# Altium PCB EncoderArm.PcbDoc
Units mil, origin at the board's own origin, x right, y up, seen from the top; angles counter-clockwise.
Board outline 1290 x 2525 mil, 2 copper layers (Top Layer, Bottom Layer); 11 components, 6 nets, 29 pads, 8 vias.
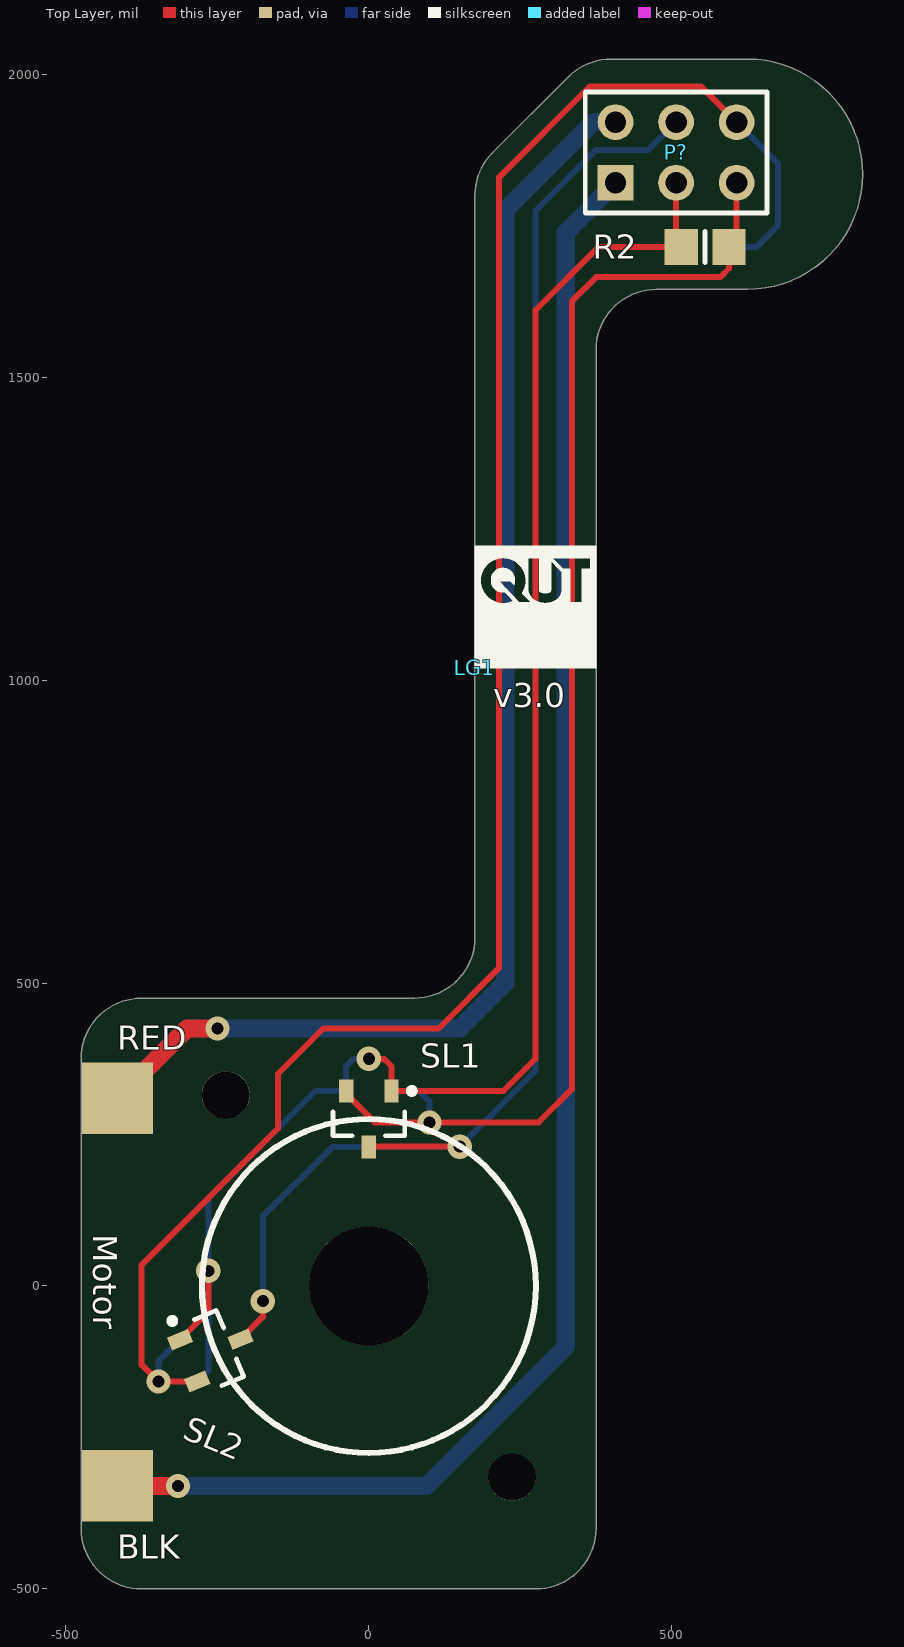
[diagram p0: Top Layer view]
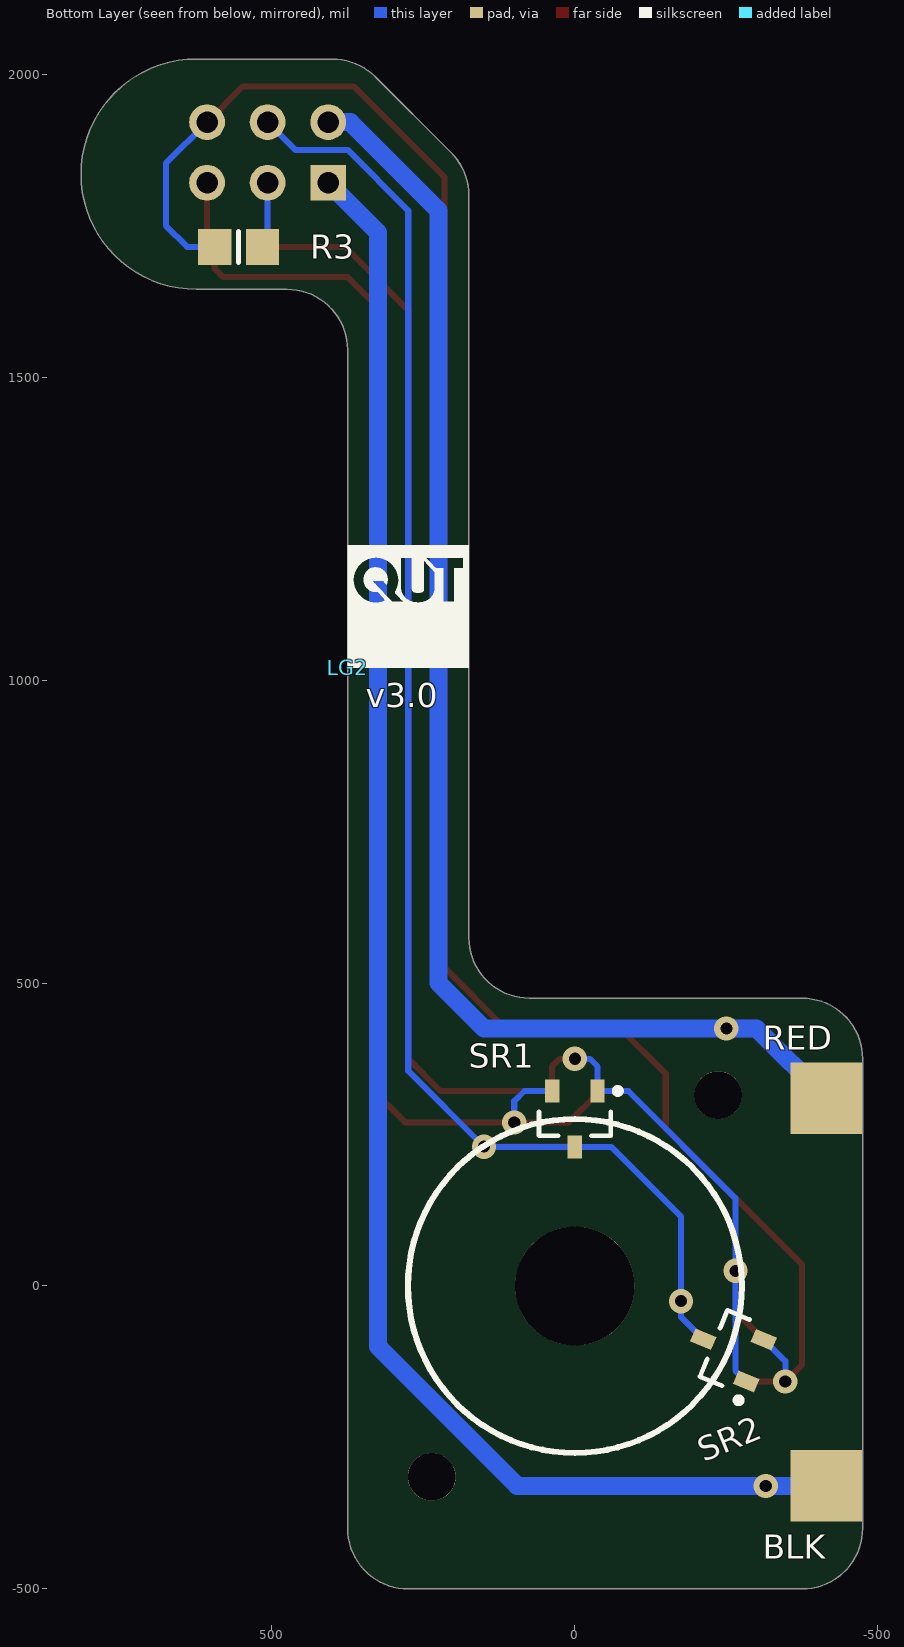
[diagram p1: Bottom Layer view, seen from below]

## Layer stack, top to bottom
Top Solder: solder mask 0.4, Solder Resist, Dk 3.5
Top Layer: signal copper 1.4
Dielectric 1: dielectric 12.6, FR-4, Dk 4.8
Bottom Layer: signal copper 1.4
Bottom Solder: solder mask 0.4, Solder Resist, Dk 3.5

## Board outline
-475,-400 ccw(c-375,-400) -375,-500 275,-500 ccw(c275,-400) 375,-400 375,1545 cw(c475,1545) 475,1645 625,1645 ccw(c625,1835) 625,2025 400,2025 ccw(c400,1925) 329.29,1995.71 204.29,1870.71 ccw(c275,1800) 175,1800 175,575 cw(c75,575) 75,475 -375,475 ccw(c-375,375) -475,375

## Design rules (kind name [scope] priority, off if disabled: settings)
Clearance [All] p1: gap=10 ignorepadtopadclearanceinfootprint=FALSE except(0: Arc-Hole Track-Hole SMDPad-Hole THPad-Hole Via-Hole Fill-Hole Poly-Hole Region-Hole Text-Hole)
PolygonConnect [All] p1: connectstyle=Relief reliefconductorwidth=10 reliefentries=4 polygonreliefangle="90 Angle" airgapwidth=10
RoutingVias [All] p1: holewidth=28 width=50 viastyle="Through Hole" minholewidth=28 minwidth=50 maxholewidth=28 maxwidth=50
SolderMaskExpansion [All] p1: expansion=4
Width [All] p1: maxlimit=30 minlimit=10 preferedwidth=10
30 further rules are at their usual default settings.

## Classes and differential pairs
component class EncoderArm: BLK LG1 LG2 P? R2 R3 RED SL1 SR1 SR2
net class Power: M1A M1B

## Components (designator, comment, footprint, x,y, rotation, side; value= is the part's Value field where it differs from the comment)
BLK "Pad_Motor" Pads_Motor -415,-330 r0 top
LG1 "QUT_Logo" QUT_Logo 175,1020 r0 top
LG2 "QUT_Logo" QUT_Logo 375,1020 r180 bottom
P? "Header 3X2" HDR2X3 407.09,1820.87 r0 top
R2 "Res2" 6-0805_M 555,1715 r180 top
R3 "Res2" 6-0805_M 555,1715 r180 bottom
RED "Pad_Motor" Pads_Motor -415,310 r0 top
SL1 "A1120 Hall Effect" SOT23-3N 0,275.59 r270 top
SL2 "A1120 Hall Effect" SOT23-3N -254.61,-105.43 r22.5 top
SR1 "A1120 Hall Effect" SOT23-3N 0,275.59 r270 bottom
SR2 "A1120 Hall Effect" SOT23-3N -254.61,-105.43 r22.5 bottom

## Footprints (in the part's own frame and the unit in brackets; to place one, negate y for a bottom-side part, rotate by r counter-clockwise, add the part's x,y. Pads: shape width x height; smd on the part's side, far side on the other; paste and mask are expansions set on the pad)
6-0805_M [mm] "Chip Resistor, Body 2.0x1.2mm, IPC Low Density"
  rect 1.4x1.5 smd: 1(-1,0) 2(1,0)
  silkscreen extent 0,-0.65 0,0.65, body extent -1.07,-0.7 1.07,0.7, height 0.7
HDR2X3 [mm] "Connector; Header; 3x2 Position"
  rect 1.5x1.5 hole 0.9: 1(0,0)
  round 1.5 hole 0.9: 2(0,2.54) 3(2.54,0) 4(2.54,2.54) 5(5.08,0) 6(5.08,2.54)
  silkscreen extent -1.27,-1.27 6.35,3.81
Pads_Motor [mm]
  rect 3x3 smd: 0(0,0)
  rect 3x3 smd far side: 0(0,0)
QUT_Logo [mil]
  silkscreen extent 0,0 200,202
SOT23-3N [mm] "SOT23, 3-Leads, Body 2.90x2.35mm, Pitch 0.95mm, IPC Medium Density"
  rect 0.95x0.6 smd: 1(-1.175,0.95) 2(-1.175,-0.95) 3(1.175,0)
  silkscreen extent -1.3,-1.5 0.7,1.93, body extent -0.7,-1.5 0.7,1.5, height 1.1

## Part data
P?: "Header, 3-Pin, Dual row"
R2 R3: "Resistor"
SL1 SL2 SR1 SR2: library part FT_SOT23-3

## Free pads (board coordinates)
  round 78.74 hole 78.74: 0(-236.22,314.96) 0(236.22,-314.96)
  round 196.85 hole 196.85: 0(0,0)

## Via types
v1: diameter 40, hole 20, Top Layer to Bottom Layer, 8 vias

## Nets (pads, with @x,y where several pads share a name; then routed paths per layer and width w, separated by ;. In a path a pad name is that pad's centre, name@x,y a point inside that pad or via, vN(x,y) a via of type N, cw(c..) or ccw(c..) an arc to the next point about the centre after c; other vN are vias at no path point)
3V3: P?.3 R2.2 R3.2 SL1.1 SL2.1 SR1.1 SR2.1 | length 2908.4
  Top Layer w10: SL2.1 -265,-41.92 v1(-265,25) ; v1(0,375) 25,375 37.4,362.6 SL1.1 221.85,321.85 275,375 275,1610.63 379.37,1715 R2.2 507.09,1723.54 P?.3
  Bottom Layer w10: SR2.1 -265,-139.66 v1(-265,25) -265,145 -88.15,321.85 SR1.1 -37.4,362.6 -25,375 v1(0,375) ; P?.3 507.09,1723.54 R3.2
GND: P?.4 SL1.3 SL2.3 SR1.3 SR2.3 | length 2712.3
  Top Layer w10: SL2.3 -175,-50.86 v1(-175,-25) ; SL1.3 0.67,230 v1(150,230)
  Bottom Layer w10: SR2.3 -175,-50.86 v1(-175,-25) -175,115 -60.67,229.33 SR1.3 v1@154.33,229.33 ; v1(150,230) 275,355 275,1775 375,1875 461.22,1875 P?.4
M1A: BLK.0 P?.1 | length 2890.1
  Top Layer w30: BLK.0@-415,-330 v1(-315,-330)
  Bottom Layer w30: BLK.0@-415,-330 v1(-315,-330) 95,-330 325,-100 325,1738.78 P?.1
M1B: P?.2 RED.0 | length 2448.8
  Top Layer w30: RED.0@-415,310 -300,425 v1(-250,425)
  Bottom Layer w30: RED.0@-415,310 -300,425 v1(-250,425) 150,425 225,500 225,1775 370.87,1920.87 P?.2
VOUT1: P?.5 R2.1 SL1.2 SR1.2 | length 2252.5
  Top Layer w10: SL1.2 -37.4,317.4 10,270 v1(100,270) 280,270 335,325 335,1625 375,1665 580,1665 594.37,1679.37 R2.1 607.09,1727.72 P?.5
  Bottom Layer w10: SR1.2 83.15,321.85 100,305 v1(100,270)
VOUT2: P?.6 R3.1 SL2.2 SR2.2 | length 3275.8
  Top Layer w10: SL2.2 v1(-347.31,-157.69) -375,-130 -375,35 -150,260 -150,350 -75,425 115,425 215,525 215,1830 365,1980 547.95,1980 P?.6
  Bottom Layer w10: v1(-347.31,-157.69) -347.31,-124.23 SR2.2 ; R3.1 640,1715 675,1750 675,1852.95 P?.6

## Silkscreen, mask and mechanical layers (free items; w line width, h text height)
Top Overlay:
  circle w10: c0,0 r275.59
  text "v3.0" at 205,955 h40
  text "Motor" at -455,85 h40 r270
Bottom Overlay:
  circle w10: c0,0 r275.59
  text "v3.0" at 345,955 h40
  text "RED" at -310,390 h40
  text "BLK" at -310,-450 h40
Mechanical 1:
  the board outline again, w10